# EAGLE board CT_schematic (EAGLE 7.6.0)

Size 100 x 80 mm. Coordinates in mm from the lower left corner, seen from the top.
Outline: 0,0 100,0 100,80 0,80 0,0
Copper layers (1*16): Top 0.035mm / dielectric 1.5mm / Bottom 0.035mm
Design rules "default": minimum track width 10mil, minimum drill 24mil, track to track 8mil, track to pad 8mil, pad to pad 8mil, via to via 8mil, smd to smd 8mil, copper to edge 40mil, drill to drill 8mil, minimum pad ring 10mil, minimum via ring 8mil, stop-mask expansion 4mil, vias tented up to drill 0mil, thermal gap 10mil

## Footprints (pad centres in the part's own frame; a part is rotated, then mirrored left to right if it is on the bottom)
C0603 = smd 0.8 x 0.8: 1 -0.762,0; 2 0.762,0
C0402 = smd 0.5 x 0.5: 1 -0.508,0; 2 0.508,0
C1210 = smd 1.2 x 2.5: 1 -1.524,0; 2 1.524,0
EXV-9H = smd 3.505 x 1.676: 1 -2.857,0; 2 2.857,0
L0603 = smd 0.8 x 0.8: 1 -0.762,0; 2 0.762,0
L1210 = smd 1.2 x 2.5: 1 -1.524,0; 2 1.524,0
PJ-037B_PACKAGE = drill 3.7 square: 1 12,0 | drill 3.2 square: 2 6,0
R0603 = smd 0.8 x 0.8: 1 -0.762,0; 2 0.762,0
LQFP48 = smd 0.3 x 1.2: 1 -2.75,-4.25; 2 -2.25,-4.25; 3 -1.75,-4.25; 4 -1.25,-4.25; 5 -0.75,-4.25; 6 -0.25,-4.25; 7 0.25,-4.25; 8 0.75,-4.25; 9 1.25,-4.25; 10 1.75,-4.25; 11 2.25,-4.25; 12 2.75,-4.25; 25 2.75,4.25; 26 2.25,4.25; 27 1.75,4.25; 28 1.25,4.25; 29 0.75,4.25; 30 0.25,4.25; 31 -0.25,4.25; 32 -0.75,4.25; 33 -1.25,4.25; 34 -1.75,4.25; 35 -2.25,4.25; 36 -2.75,4.25 | smd 1.2 x 0.3: 13 4.25,-2.75; 14 4.25,-2.25; 15 4.25,-1.75; 16 4.25,-1.25; 17 4.25,-0.75; 18 4.25,-0.25; 19 4.25,0.25; 20 4.25,0.75; 21 4.25,1.25; 22 4.25,1.75; 23 4.25,2.25; 24 4.25,2.75; 37 -4.25,2.75; 38 -4.25,2.25; 39 -4.25,1.75; 40 -4.25,1.25; 41 -4.25,0.75; 42 -4.25,0.25; 43 -4.25,-0.25; 44 -4.25,-0.75; 45 -4.25,-1.25; 46 -4.25,-1.75; 47 -4.25,-2.25; 48 -4.25,-2.75
SSOP-16 = smd 1.981 x 0.356: 1 -2.464,2.223; 2 -2.464,1.587; 3 -2.464,0.953; 4 -2.464,0.318; 5 -2.464,-0.318; 6 -2.464,-0.953; 7 -2.464,-1.587; 8 -2.464,-2.223; 9 2.464,-2.223; 10 2.464,-1.587; 11 2.464,-0.953; 12 2.464,-0.318; 13 2.464,0.318; 14 2.464,0.953; 15 2.464,1.587; 16 2.464,2.223
182-009-MALE = drill 1.194 pad 1.524 octagon: 1 -5.537,10.923; 2 -2.769,10.923; 3 0,10.923; 4 2.769,10.923; 5 5.537,10.923; 6 -4.153,8.08; 7 -1.384,8.08; 8 1.384,8.08; 9 4.153,8.08 | hole 3.048: -12.446,9.501; 12.446,9.501
TDFN-8/6MM = smd 0.3 x 0.75: 1 0,0; 2 0.5,0; 3 1,0; 4 1.5,0; 5 1.5,3; 6 1,3; 7 0.5,3; 8 0,3
ASEK = smd 1.4 x 1: 1 -1.1,-0.8; 2 1.1,-0.8; 3 1.1,0.8; 4 -1.1,0.8
ASFL1 = smd 1.7 x 1.5: 1 -1.27,-1.1; 2 1.27,-1.1; 3 1.27,1.1; 4 -1.27,1.1
WSON-8 = smd 0.3 x 0.6: 1 -0.75,0; 2 0.05,0; 3 0.85,0; 4 1.65,0; 5 1.65,3.8; 6 0.85,3.8; 7 0.05,3.8; 8 -0.75,3.8 | smd 3 x 2.6: PAD 0.45,1.9
SON-6 = smd 0.55 x 0.3: 1 -0.355,0.5 | smd 0.52 x 0.3: 2 -0.37,0; 3 -0.37,-0.5; 4 0.37,-0.5; 5 0.37,0; 6 0.37,0.5
SW_4-1437565-2 = smd 1.4 x 2.1: 1 -2.23,4.55; 2 -2.23,-4.55; 3 2.23,4.55; 4 2.23,-4.55
LGM67K-G1J2-24-Z = smd 0.8 x 1.4: A -2,0; C 0,0
NC7SZ125M5X = smd 1.3 x 0.7: 1 -1.3,0.95; 2 -1.3,0; 3 -1.3,-0.95; 4 1.3,-0.95; 5 1.3,0.95

## Placement (x,y rotation side)
C1  1e-07  [C0603]  -46.99,60.96 0 top  (outside the outline)
C2  1e-07  [C0603]  -50.8,60.96 0 top  (outside the outline)
C3  1e-07  [C0603]  -54.61,60.96 0 top  (outside the outline)
C4  1e-07  [C0603]  -58.42,60.96 0 top  (outside the outline)
C5  4.7e-06  [C0603]  -39.37,60.96 0 top  (outside the outline)
C6  1e-07  [C0603]  -62.23,60.96 0 top  (outside the outline)
C7  1e-08  [C0603]  -66.04,60.96 0 top  (outside the outline)
C8  1e-06  [C0603]  -69.85,60.96 0 top  (outside the outline)
C9  1e-06  [C0603]  -15.24,66.04 0 top  (outside the outline)
C10  1e-06  [C0603]  -19.05,66.04 0 top  (outside the outline)
C11  2.2e-07  [C0603]  -43.18,60.96 0 top  (outside the outline)
C12  1e-06  [C0603]  -22.86,66.04 0 top  (outside the outline)
C13  1e-06  [C0603]  -26.67,66.04 0 top  (outside the outline)
C14  1e-08  [C0402]  -64.77,66.04 0 top  (outside the outline)
C15  1e-08  [C0402]  -68.58,66.04 0 top  (outside the outline)
C16  1e-08  [C0402]  -15.24,71.12 0 top  (outside the outline)
C17  1e-08  [C0402]  -19.05,71.12 0 top  (outside the outline)
C18  1e-05  [C1210]  -16.51,55.88 0 top  (outside the outline)
C19  1e-05  [C1210]  -22.86,55.88 0 top  (outside the outline)
C20  1e-07  [C0402]  -22.86,71.12 0 top  (outside the outline)
C21  0.0001  [EXV-9H]  -38.1,48.26 0 top  (outside the outline)
C22  0.0001  [EXV-9H]  -49.53,48.26 0 top  (outside the outline)
C23  1e-08  [C0402]  -26.67,71.12 0 top  (outside the outline)
F1  240.0  [L0603]  -30.48,66.04 0 top  (outside the outline)
I1  1e-05  [L1210]  -29.21,55.88 0 top  (outside the outline)
J1  PJ-037B  [PJ-037B_PACKAGE]  -67.31,7.62 0 top  (outside the outline)
R1  10000.0  [R0603]  -60.96,54.61 0 top  (outside the outline)
R2  1000.0  [R0603]  -34.29,66.04 0 top  (outside the outline)
R3  1600.5  [R0603]  -38.1,66.04 0 top  (outside the outline)
R4  4700.0  [R0603]  -41.91,66.04 0 top  (outside the outline)
R5  2200.0  [R0603]  -45.72,66.04 0 top  (outside the outline)
R6  2200.0  [R0603]  -49.53,66.04 0 top  (outside the outline)
R7  10000.0  [R0603]  -66.04,54.61 0 top  (outside the outline)
R8  100000.0  [R0603]  -40.64,54.61 0 top  (outside the outline)
R9  10000.0  [R0603]  -15.24,60.96 0 top  (outside the outline)
R10  10000.0  [R0603]  -20.32,60.96 0 top  (outside the outline)
R11  10000.0  [R0603]  -25.4,60.96 0 top  (outside the outline)
R12  100000.0  [R0603]  -45.72,54.61 0 top  (outside the outline)
R13  2231.0  [R0603]  -53.34,66.04 0 top  (outside the outline)
R14  1000.0  [R0603]  -57.15,66.04 0 top  (outside the outline)
R15  10000.0  [R0603]  -30.48,60.96 0 top  (outside the outline)
R16  10000.0  [R0603]  -35.56,60.96 0 top  (outside the outline)
R17  9100.0  [R0603]  -60.96,66.04 0 top  (outside the outline)
R18  680000.0  [R0603]  -50.8,54.61 0 top  (outside the outline)
R19  120000.0  [R0603]  -55.88,54.61 0 top  (outside the outline)
U1  STM32L151C6T6  [LQFP48]  -63.5,27.94 0 top  (outside the outline)
U2  LTC2804CGN-1#PBF  [SSOP-16]  -48.26,27.94 0 top  (outside the outline)
U3  182-009-113R531  [182-009-MALE]  -36.83,6.35 0 top  (outside the outline)
U4  24AA128T-I/MNY  [TDFN-8/6MM]  -25.4,38.1 0 top  (outside the outline)
U5  ASEK-32.768KHz-ECST  [ASEK]  -29.21,48.26 0 top  (outside the outline)
U6  ASFL1-25MHZ-NCS  [ASFL1]  -62.23,38.1 0 top  (outside the outline)
U7  LP3878SDX-ADJ/NOPB  [WSON-8]  -45.72,36.83 0 top  (outside the outline)
U8  TPS3895ADRYR  [SON-6]  -29.21,69.85 0 top  (outside the outline)
U9  4-1437565-2  [SW_4-1437565-2]  -27.94,27.94 0 top  (outside the outline)
U10  Q65110A2395  [LGM67K-G1J2-24-Z]  -59.69,46.99 0 top  (outside the outline)
U11  nc7sz125m5x  [NC7SZ125M5X]  -34.29,54.61 0 top  (outside the outline)

## Library data of the parts
C1-C23 F1 I1 J1 R1-R19 U1-U11 = circuit_tree

## Nets
CLK_U1_3: U1.3 U5.3
CLK_U1_5: U1.5 U6.3
GND: C1.2 C2.2 C3.2 C4.2 C5.2 C6.2 C7.2 C8.2 C9.2 C10.2 C12.2 C13.2 C14.2 C15.2 C16.2 C17.2 C18.2 C19.2 C20.2 C21.2 C22.2 C23.2 J1.2 R2.2 R7.2 R11.2 R14.2 R17.2 R19.2 U1.8 U1.23 U1.35 U1.47 U2.8 U3.5 U4.4 U5.2 U6.2 U7.3 U7.PAD U8.2 U10.C U11.1 U11.3
NET_U1_1: C6.1 U1.1
NET_U1_7: R4.1 U1.7 U11.4
NET_U1_9: C7.1 C8.1 F1.1 U1.9
NET_U1_42: R5.1 U1.42 U4.6
NET_U1_43: R6.1 U1.43 U4.5
NET_U1_44: R7.1 U1.44
NET_U1_45: R3.1 U1.45 U10.A
NET_U1_46: R1.1 U1.46 U9.3 U9.4
NET_U2_6: C9.1 U2.6
NET_U2_7: C11.1 I1.2 U2.7
NET_U2_9: C10.1 U2.9
NET_U2_10: C11.2 U2.10
NET_U2_11: R8.1 U2.11
NET_U3_2: U2.1 U3.2
NET_U3_3: U2.3 U3.3
NET_U3_7: U2.2 U3.7
NET_U3_8: U2.4 U3.8
NET_U4_1: R9.1 U4.1
NET_U4_2: R10.1 U4.2
NET_U4_3: R11.1 U4.3
NET_U7_1: C17.1 U7.1
NET_U7_6: R13.2 R14.1 U7.6
NET_U7_8: R12.1 U7.8
NET_U8_1: R16.1 R17.1 U8.1
NET_U8_3: R18.2 R19.1 U8.3
NET_U8_4: R15.1 U8.4 U11.2
NET_U9_1: R2.1 U9.1 U9.2
PROC_USART1_CTS: U1.32 U2.13
PROC_USART1_RTS: U1.33 U2.15
PROC_USART1_RX: U1.31 U2.16
PROC_USART1_TX: U1.30 U2.14
VCC_S1_13V8: C18.1 C21.1 C22.1 J1.1 R12.2 U7.4
VCC_TIER1_3V3: C1.1 C2.1 C3.1 C4.1 C5.1 C12.1 C13.1 C14.1 C15.1 C16.1 C19.1 C20.1 C23.1 F1.2 I1.1 R1.2 R3.2 R4.2 R5.2 R6.2 R8.2 R9.2 R10.2 R13.1 R15.2 R16.2 R18.1 U1.24 U1.36 U1.48 U2.5 U2.12 U4.7 U4.8 U5.4 U6.4 U7.5 U8.6 U11.5

## Tracks (layer width: path | path; a pad name or v marks a point on that pad's centre or on a via)
CLK_U1_3  (1 unrouted)
CLK_U1_5  (1 unrouted)
GND  (43 unrouted)
NET_U1_1  (1 unrouted)
NET_U1_7  (2 unrouted)
NET_U1_9  (3 unrouted)
NET_U1_42  (2 unrouted)
NET_U1_43  (2 unrouted)
NET_U1_44  (1 unrouted)
NET_U1_45  (2 unrouted)
NET_U1_46  (3 unrouted)
NET_U2_6  (1 unrouted)
NET_U2_7  (2 unrouted)
NET_U2_9  (1 unrouted)
NET_U2_10  (1 unrouted)
NET_U2_11  (1 unrouted)
NET_U3_2  (1 unrouted)
NET_U3_3  (1 unrouted)
NET_U3_7  (1 unrouted)
NET_U3_8  (1 unrouted)
NET_U4_1  (1 unrouted)
NET_U4_2  (1 unrouted)
NET_U4_3  (1 unrouted)
NET_U7_1  (1 unrouted)
NET_U7_6  (2 unrouted)
NET_U7_8  (1 unrouted)
NET_U8_1  (2 unrouted)
NET_U8_3  (2 unrouted)
NET_U8_4  (2 unrouted)
NET_U9_1  (2 unrouted)
PROC_USART1_CTS  (1 unrouted)
PROC_USART1_RTS  (1 unrouted)
PROC_USART1_RX  (1 unrouted)
PROC_USART1_TX  (1 unrouted)
VCC_S1_13V8  (5 unrouted)
VCC_TIER1_3V3  (38 unrouted)